# Altium PCB PCBA-2121-01.PcbDoc (part 1 of 2)
Units mil, origin at the board's own origin, x right, y up, seen from the top; angles counter-clockwise.
Board outline 748.03 x 2362.2 mil, 4 copper layers (L1, L2, L3, L4), stack 62.192 mil thick; 70 components, 51 nets, 274 pads, 177 vias.
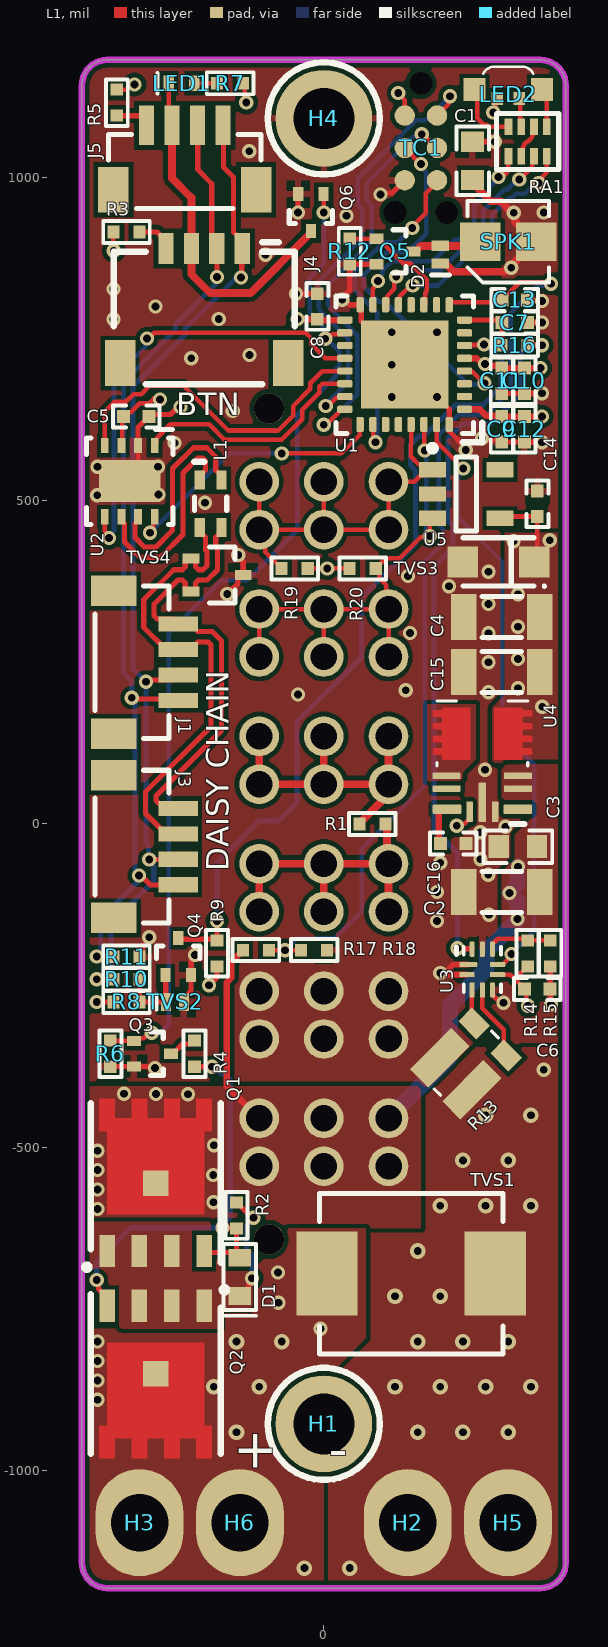
[diagram p0: L1 view]
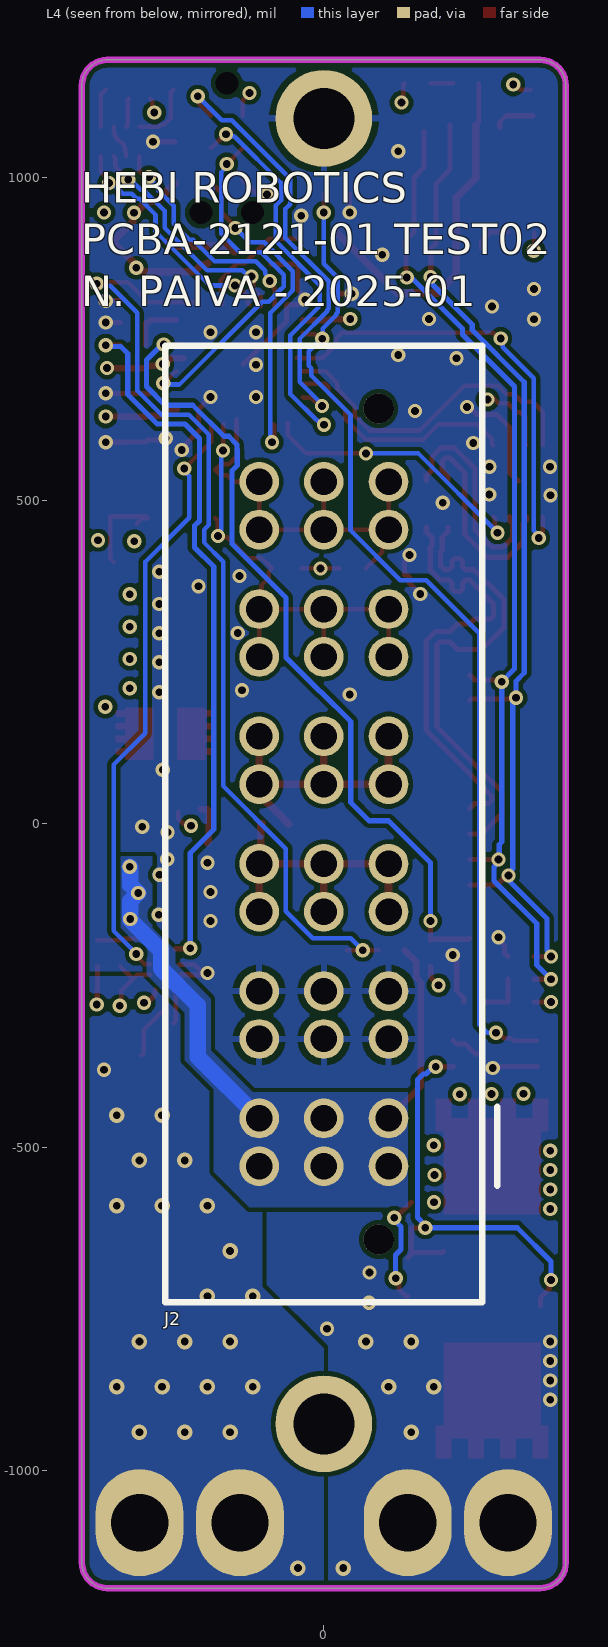
[diagram p1: L4 view, seen from below]
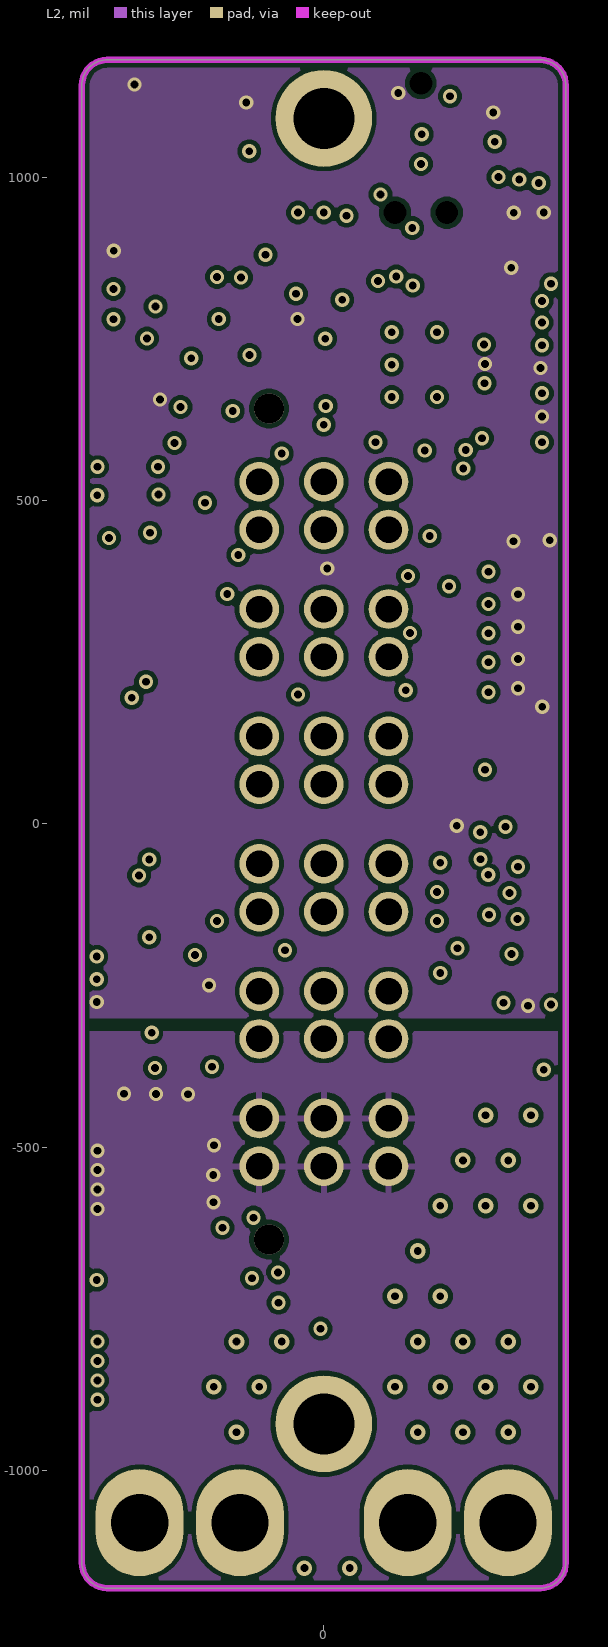
[diagram p2: L2]
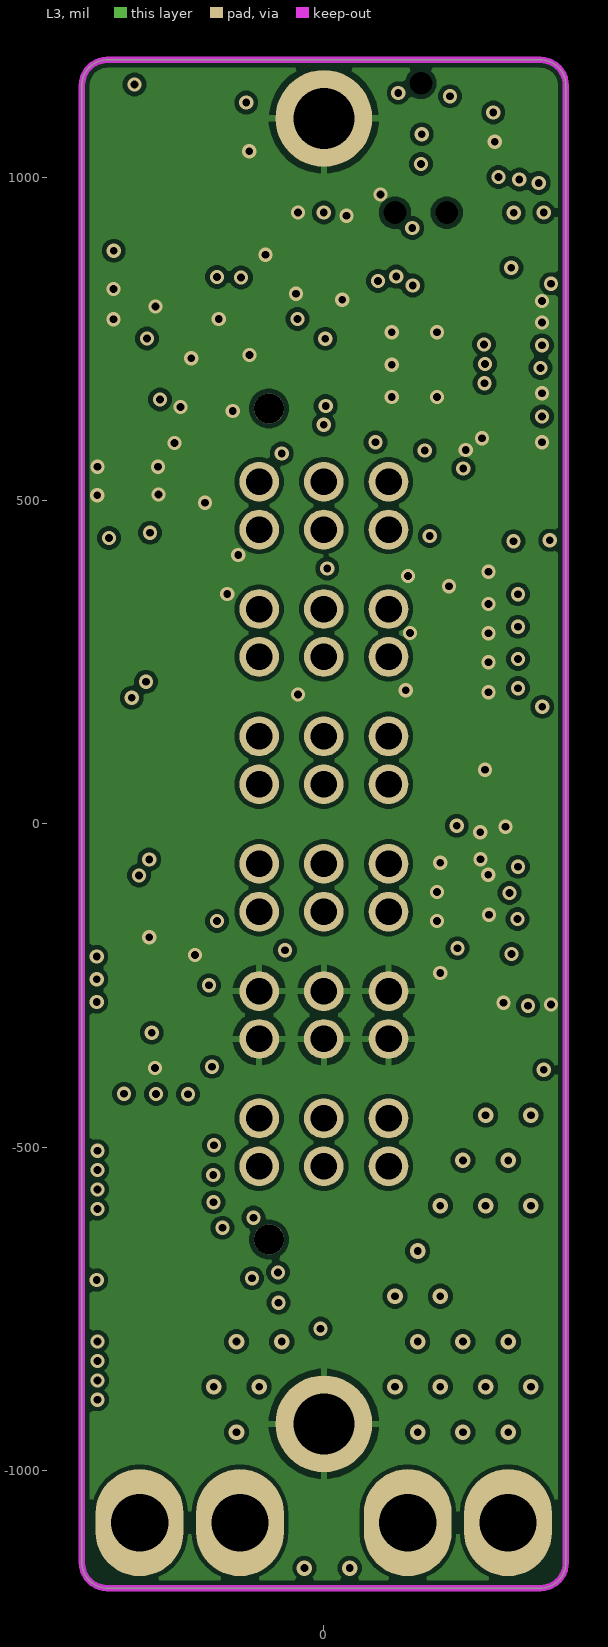
[diagram p3: L3]
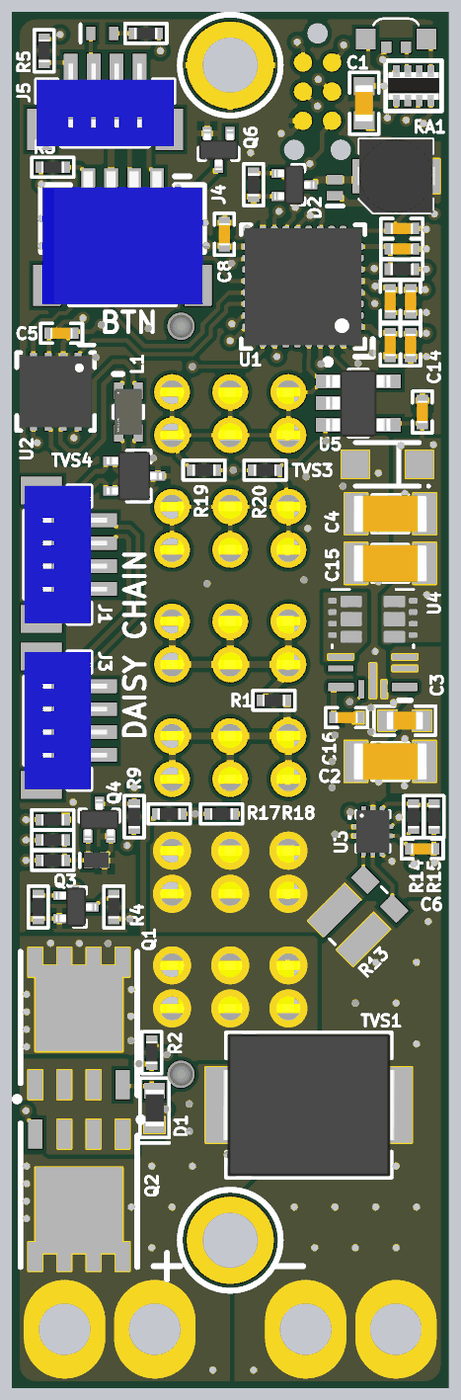
[diagram p4: 3D render of the assembled board from above, using the file's embedded part models]

## Layer stack, top to bottom
Top Solder: solder mask 0.4, Solder Resist, Dk 3.5
L1: signal copper 1.7
Dielectric 1: prepreg 2.8, PP-006, Dk 4.1
L2: signal copper 1.378
Dielectric 4: core 50.4362, Dk 4.2
L3: signal copper 1.378
Dielectric 2: prepreg 2.8, PP-006, Dk 4.1
L4: signal copper 1.7
Bottom Solder: solder mask 0.4, Solder Resist, Dk 3.5

## Board outline
-374.02,-1141.73 ccw(c-334.65,-1141.73) -334.65,-1181.1 334.65,-1181.1 ccw(c334.65,-1141.73) 374.02,-1141.73 374.02,1141.73 ccw(c334.65,1141.73) 334.65,1181.1 -334.65,1181.1 ccw(c-334.65,1141.73) -374.02,1141.73

## Design rules (kind name [scope] priority, off if disabled: settings)
Clearance [All] p1: gap=7 ignorepadtopadclearanceinfootprint=FALSE
ComponentClearance NO_BOM [IsNoBOMComponent] p1: gap=0 collisioncheckmode=3 verticalgap=0 showdistances=FALSE donotcheckwithout3dbody=TRUE
ComponentClearance ComponentClearance_2 [HasFootprint('ARJM11C7-114-BA-EW2-Footprint-1') vs HasFootprint('39-30-1020')] p2: gap=-10000 collisioncheckmode=3 verticalgap=100000 showdistances=FALSE
ComponentClearance ComponentClearance_1 [HasFootprint('ARJM11C7-114-BA-EW2-Footprint-1') vs HasFootprint('ARJM11C7-114-BA-EW2-Footprint-1')] p3: gap=-10000 collisioncheckmode=3 verticalgap=100000 showdistances=FALSE
ComponentClearance [All] p4: gap=10 collisioncheckmode=3 verticalgap=10 showdistances=FALSE
DiffPairsRouting [All] p1: maxlimit=10 minlimit=8 mostfreqgap=8 toplayer_minwidth=7 toplayer_maxwidth=15 toplayer_prefwidth=7 midlayer1_minwidth=7 midlayer1_maxwidth=15 midlayer1_prefwidth=7 midlayer2_minwidth=7 midlayer2_maxwidth=15 midlayer2_prefwidth=7 bottomlayer_minwidth=7 bottomlayer_maxwidth=15 bottomlayer_prefwidth=7 maxuncoupledlength=500
Height [All] p1: minheight=0 maxheight=2000 prefheight=500
HoleSize [All] p1: absolutevalues=TRUE maxlimit=1000 minlimit=1 maxpercent=80.000 minpercent=20.000
HoleToHoleClearance HoleToHoleClearance_1 [HasFootprint('PJ-037A') vs HasFootprint('PJ-037A')] p1: gap=0 allowstackedmicrovias=TRUE
HoleToHoleClearance [All] p2: gap=10 allowstackedmicrovias=TRUE
MinimumSolderMaskSliver [All] p1 off: minsoldermaskwidth=10
PolygonConnect PolygonConnect_1 [All vs IsNamedPolygon('NO_THERMAL')] p1: connectstyle=Direct reliefconductorwidth=10 reliefentries=4 polygonreliefangle="90 Angle" airgapwidth=10
PolygonConnect [All] p2: thpad.connectstyle=Relief thpad.reliefconductorwidth=10 thpad.reliefentries=4 thpad.polygonreliefangle="90 Angle" thpad.airgapwidth=10 smdpad.connectstyle=Relief smdpad.reliefconductorwidth=10 smdpad.reliefentries=4 smdpad.polygonreliefangle="90 Angle" smdpad.airgapwidth=10 via.connectstyle=Direct via.reliefconductorwidth=10 via.reliefentries=4 via.polygonreliefangle="90 Angle" via.airgapwidth=10
RoutingVias [All] p1: holewidth=12 width=22 viastyle="Through Hole" minholewidth=12 minwidth=22 maxholewidth=40 maxwidth=100
SilkToSilkClearance [All] p1 off: silktosilkclearance=10
SilkToSolderMaskClearance [IsPad] p1 off: minsilkscreentomaskgap=10 clearancetoexposedcopper=TRUE
SolderMaskExpansion "Via Tenting" [IsVia] p1: expansion=2 istentingtop=TRUE
SolderMaskExpansion SolderMaskExpansion_1 [All] p2: expansion=2 istentingtop=FALSE
SupplyNets "Schematic Supply Nets" [InNet('V-')] p1: voltage=0.000
SupplyNets "Schematic Supply Nets_5" [InNet('VBAT')] p2: voltage=0.000
SupplyNets "Schematic Supply Nets_4" [InNet('3V3')] p3: voltage=0.000
SupplyNets "Schematic Supply Nets_3" [InNet('GND')] p4: voltage=0.000
SupplyNets "Schematic Supply Nets_2" [InNet('V+')] p5: voltage=0.000
Width [All] p1: maxlimit=200 minlimit=7 preferedwidth=8
22 further rules are at their usual default settings.

## Classes and differential pairs
differential pair CAN_B: +CAN_B_P -CAN_B_N
differential pair I_SNS: +I_SNS_P -I_SNS_N
differential pair CAN: +CAN_P -CAN_N

## Components (designator, comment, footprint, x,y, rotation, side; value= is the part's Value field where it differs from the comment)
C1 "C-10uf-X5R-16V-10%-0603" C0603 230,1025 r90 top
C2 "C-2.2uf-X7R-100V-10%-1206" C1206 275,-105 r0 top
C3 "C-0.1uf-X7R-100V-20%-0603" C0603 300,-35 r0 top
C4 "C-22uf-X5R-25V-20%-1206" C1206 275,320 r0 top
C5 "C-0.1uf-X7R-25V-10%-0402" C0402 -290,630 r180 top
C6 "C-0.1uf-X7R-25V-10%-0402" C0402 330,-255 r180 top
C7 "C-10000pf-X7R-50V-10%-0402" C0402 295,775 r180 top
C8 "C-0.1uf-X7R-25V-10%-0402" C0402 -10,800 r270 top
C9 "C-0.1uf-X7R-25V-10%-0402" C0402 275,610 r90 top
C10 "C-0.1uf-X7R-25V-10%-0402" C0402 310,685 r90 top
C11 "C-10000pf-X7R-50V-10%-0402" C0402 275,685 r90 top
C12 "C-1uf-X5R-25V-10%-0402" C0402 310,610 r270 top
C13 "C-1uf-X5R-25V-10%-0402" C0402 295,810 r0 top
C14 "C-0.1uf-X7R-25V-10%-0402" C0402 330,495 r270 top
C15 "C-22uf-X5R-25V-20%-1206" C1206 275,235 r0 top
C16 "C-1uf-X5R-25V-10%-0402" C0402 200,-30 r180 top
D1 "CZRU52C10" CZRU52C10 -130,-700 r90 top
D2 "SBR05U20LP-7" DFN1006-2_DIODES 180,880 r90 top
H1 "M2-PLATED" M2-PLATED-NORMAL 0,-927.17 r0 top
H2 "PAD-AWG-12-WIDE" AWG-12-With-Wire 129.68,-1080 r180 top
H3 "PAD-AWG-12-WIDE" AWG-12-With-Wire -284.68,-1080 r180 top
H4 "M2-PLATED" M2-PLATED-NORMAL 0,1090.55 r0 top
H5 "PAD-AWG-12-WIDE" AWG-12-With-Wire 284.68,-1080 r180 top
H6 "PAD-AWG-12-WIDE" AWG-12-With-Wire -129.68,-1080 r180 top
J1 "BM04B-SRSS-TB(LF)(SN)" BM04B-SRSS-TB -275,250 r90 top
J2 "MPT-06-6.30-01-T-V" MPT-06-6.30-01-T-V-Footprint-1 0,0 r90 bottom locked
J3 "BM04B-SRSS-TB(LF)(SN)" BM04B-SRSS-TB -275,-35 r90 top
J4 "04FMN-SMT-A-TF(LF)(SN)" 04FMN-SMT-A-TF(LF)(SN)-Footprint-1 -185,795 r180 top
J5 "BM04B-SRSS-TB(LF)(SN)" BM04B-SRSS-TB -215,1030 r180 top
L1 "SRF2012-900YA" FP-SRF2012A-MFG -175,495 r270 top
LED1 "IN-S42ATG" IN-S42AT -220,1145 r180 top
LED2 "HSMF-C115" HSMF-C115 285,1135 r0 top
Q1 "FDMS86163P" FDMS86300DC -260,-555 r0 top
Q2 "FDMS86163P" FDMS86300DC -260,-850 r180 top
Q3 "DMN601TK-7" SOT50P160X80-3L -265,-355 r0 top
Q4 "DMN601TK-7" SOT50P160X80-3L -225,-205 r90 top
Q5 "DMN601TK-7" SOT50P160X80-3L 110,885 r0 top
Q6 "DMN601TK-7" SOT50P160X80-3L -20,945 r270 top
R1 "R-10k-1%-0.063w-0402" R0402 75,0 r0 top
R2 "R-100k-1%-0.063w-0402" R0402 -135,-605 r270 top
R3 "R-470-1%-0.063w-0402" R0402 -305,915 r0 top
R4 "R-200k-1%-0.063w-0402" R0402 -200,-355 r270 top
R5 "R-470-1%-0.063w-0402" R0402 -320,1115 r270 top
R6 "R-10k-1%-0.063w-0402" R0402 -330,-355 r90 top
R7 "R-470-1%-0.063w-0402" R0402 -145,1145 r180 top
R8 "R-1M-1%-0.063w-0402" R0402 -305,-275 r180 top
R9 "R-1M-1%-0.063w-0402" R0402 -165,-200 r270 top
R10 "R-100k-1%-0.063w-0402" R0402 -305,-240 r0 top
R11 "R-100k-1%-0.063w-0402" R0402 -305,-205 r0 top
R12 "R-100k-1%-0.063w-0402" R0402 40,885 r90 top
R13 "WSKW06122L000FEA" WSKW0612 220,-370 r315 top
R14 "R-200k-1%-0.063w-0402" R0402 315,-200 r90 top
R15 "R-100k-1%-0.063w-0402" R0402 350,-200 r270 top
R16 "R-10k-1%-0.063w-0402" R0402 295,740 r180 top
R17 "R-51k-1%-0.063w-0402" R0402 -105,-195 r0 top
R18 "R-2.55k-1%-0.063w-0402" R0402 -15,-195 r180 top
R19 "R-2.55k-1%-0.063w-0402" R0402 -45,395 r180 top
R20 "R-2.55k-1%-0.063w-0402" R0402 60,395 r0 top
RA1 "RA-4-C-100-5%-0.063w-0804" 741C083 315,1055 r270 top
SPK1 "SMT-0340-T-R" SMT-0340-T-R 285,900 r90 top
TC1 "CMP-694-0001-1" TC2030-MCP-NL_SMALL 150,1045 r270 top
TVS1 "5.0SMDJ51CA" DIOM6959X26L 135,-695 r180 top
TVS2 "D3V3H1U2LP-7B" DFN70P101X53-2N -230,-275 r0 top
TVS3 "PTVS3V3S1UR,115" SOD-123W_NXP 270,405 r180 top
TVS4 "ESD2CAN24DCKRQ1" SOT65P210X90-3L -165,385 r0 top
U1 "STM32L431KBU6" QFN50P500X500X60_HS-33L 125,710 r180 top
U2 "TCAN3414DRBR" SON65P300X100_HS-9L -300,530 r270 top
U3 "INA190A2IRSWR" QFN40P140X180X55-10L 245,-225 r0 top
U4 "TPSM365R6V3RDNR" TPSM365R6V3RDNR-Footprint-1 245,100 r180 top
U5 "24AA02E48T-I/OT" SOT95P280X100-5N 220,510 r0 top

## Footprints (in the part's own frame and the unit in brackets; to place one, negate y for a bottom-side part, rotate by r counter-clockwise, add the part's x,y. Pads: shape width x height; smd on the part's side, far side on the other; paste and mask are expansions set on the pad)
04FMN-SMT-A-TF(LF)(SN)-Footprint-1 [mm]
  rect 0.6x1.2 smd: 1(-1.5,-2.4) 2(-0.5,-2.4) 3(0.5,-2.4) 4(1.5,-2.4)
  rect 1.2x1.8 smd: PAD(-3.3,2.1) PAD(3.3,2.1)
  silkscreen extent -3.56,-2.65 3.56,2.93, body extent -3.5,-2.88 3.5,2.92, height 3.04
741C083 [mm] "CTS 741 0804 quad resistor pack 2.0x1.0mm .5mm height"
  rect 0.65x0.3 smd: 1(-0.575,0.75) 2(-0.575,0.25) 3(-0.575,-0.25) 4(-0.575,-0.75) 5(0.575,-0.75) 6(0.575,-0.25) 7(0.575,0.25) 8(0.575,0.75)
  silkscreen extent -1.1,-1.22 1.1,1.22, body extent -0.65,-1.1 0.65,1.1, height 0.5
AWG-12-With-Wire [mm] "IPC-2222-B"
  oval 3.45x4.2 hole 2.25: HOLE(0,0)
  body extent -1.7,-1.7 1.7,1.7, height 25.4
BM04B-SRSS-TB [mm] "JST SH 4 pin TOP entry"
  rect 1.2x1.8 smd: 0(-2.8,1.263) 0(2.8,1.263)
  rect 0.6x1.55 smd: 1(-1.5,-1.262) 2(-0.5,-1.262) 3(0.5,-1.262) 4(1.5,-1.262)
  silkscreen extent -3,-0.9 3,2, body extent -3,-1.6 3,2, height 4.3
C0402 [mm] "Generic 0402 Capacitor"
  rect 0.5x0.5 smd: 1(-0.5,0) 2(0.5,0)
  silkscreen extent -0.91,-0.43 0.91,0.43, body extent -0.5,-0.25 0.5,0.25, height 0.55
C0603 [mm] "Generic 0603 Capacitor"
  rect 0.8x0.9 smd: 1(-0.75,0) 2(0.75,0)
  silkscreen extent -1.35,-0.64 1.35,0.64, body extent -0.8,-0.4 0.8,0.4, height 0.9
C1206 [mm] "Generic 1206 Capacitor"
  rect 1x1.8 smd: 1(-1.5,0) 2(1.5,0)
  silkscreen extent -0.77,-0.8 0.77,0.8, body extent -1.6,-0.8 1.6,0.8, height 1.8
CZRU52C10 [mm]
  rect 0.7x0.9 smd: A(0.75,0) C(-0.75,0)
  silkscreen extent -1.52,-0.64 1.3,0.64, body extent -0.8,-0.4 0.8,0.4, height 0.55
DFN70P101X53-2N [mm] "DFN, 2-Leads, Body 0.61x1.01mm, Pitch 0.70mm, IPC Medium Density"
  rect 0.4x0.7 smd: A(0.35,0) C(-0.35,0)
  silkscreen extent -0.73,-0.3 -0.73,0.3, body extent -0.54,-0.34 0.54,0.34, height 0.53
DFN1006-2_DIODES [mm] "DFN1006-2 from DIODES INC"
  rect 0.4x0.7 smd: A(0.35,0) C(-0.35,0)
  silkscreen extent -0.8,-0.35 -0.8,0.35, body extent -0.54,-0.34 0.54,0.34, height 0.53
DIOM6959X26L [mm] "Molded Diode, 2-Leads, Body 6.86x5.91mm, IPC High Density"
  rect 2.4x3.3 smd: A(3.3,0) C(-3.3,0)
  silkscreen extent -3.6,-3.15 3.6,3.15, body extent -3.77,-3.11 3.77,3.11, height 2.62
FDMS86300DC [mm] "FDMS86300DC N-Channel Dual Cool PowerTrench MOSFET from Fairchild"
  rect 1x1 smd paste-1: D(0,0)
  rect 0.61x1.27 smd: G(1.905,-2.67) S(-1.905,-2.67) S(-0.635,-2.67) S(0.635,-2.67)
  L1 region: -2.21,3.305 -1.6,3.305 -1.6,2.535 -0.94,2.535 -0.94,3.305 -0.33,3.305 -0.33,2.535 0.33,2.535 0.33,3.305 0.94,3.305 0.94,2.535 1.6,2.535 1.6,3.305 2.21,3.305 2.21,2.035 1.905,2.035 1.905,-1.215 -1.905,-1.215 -1.905,2.035 -2.21,2.035
  silkscreen extent -2.8,-3.4 2.55,3.13, body extent -2.55,-3.13 2.55,3.13, height 1.05
FP-SRF2012A-MFG [mm]
  rect 0.75x0.4 smd: 1(-0.925,-0.425) 2(-0.925,0.425) 3(0.925,0.425) 4(0.925,-0.425)
  silkscreen extent -1.65,-0.64 0.25,0.64, body extent -1.4,-0.8 1.4,0.8, height 0.25
HSMF-C115 [mm] "HSMF-C115 LED CHIP RGB"
  rect 0.85x0.9 smd: 1(-1.325,0) 4(1.325,0)
  rect 0.45x0.5 smd: 2(-0.425,-0.35) 3(0.425,-0.35)
  silkscreen extent -0.99,0.62 0.99,0.9, body extent -1.25,-0.1 1.25,0.9, height 1
IN-S42AT [mm] "single 0402 LED 0.35mm height based on IN-S42AT"
  rect 0.4x0.6 smd: A(-0.5,0) C(0.5,0)
  silkscreen extent 0.95,-0.4 0.95,0.4, body extent -0.5,-0.25 0.5,0.25, height 0.35
M2-PLATED-NORMAL [mm]
  round 3.8 hole 2.4: HOLE(0,0)
  silkscreen extent -2.2,-2.2 2.2,2.2
MPT-06-6.30-01-T-V-Footprint-1 [mm] "Generic 0402 Capacitor"
  round 1.56 hole 1.04: 1(-13.44,-2.54) 1(-13.44,0) 1(-13.44,2.54) 1(-11.56,-2.54) 1(-11.56,0) 1(-11.56,2.54) 2(-8.44,-2.54) 2(-8.44,0) 2(-8.44,2.54) 2(-6.56,-2.54) 2(-6.56,0) 2(-6.56,2.54) 3(-3.44,-2.54) 3(-3.44,0) 3(-3.44,2.54) 3(-1.56,-2.54) 3(-1.56,0) 3(-1.56,2.54) 4(1.56,-2.54) 4(1.56,0) 4(1.56,2.54) 4(3.44,-2.54) 4(3.44,0) 4(3.44,2.54) 5(6.56,-2.54) 5(6.56,0) 5(6.56,2.54) 5(8.44,-2.54) 5(8.44,0) 5(8.44,2.54) 6(11.56,-2.54) 6(11.56,0) 6(11.56,2.54) 6(13.44,-2.54) 6(13.44,0) 6(13.44,2.54)
  round 1.19 hole 1.19 unplated: ""(-16.31,-2.15) ""(16.31,-2.15)
  silkscreen extent -18.77,-6.8 18.77,6.23, body extent -19.78,-6.22 19.78,6.23, height 11.5
QFN40P140X180X55-10L [mm] "QFN, 10-Leads, Body 1.40x1.80mm, Pitch 0.40mm, IPC High Density"
  rrect50% 0.7x0.2 smd: 1(-0.55,0.2)
  rrect50% 0.6x0.2 smd: 2(-0.6,-0.2) 6(0.6,-0.2) 7(0.6,0.2)
  rrect50% 0.2x0.6 smd: 3(-0.4,-0.8) 4(0,-0.8) 5(0.4,-0.8) 8(0.4,0.8) 9(0,0.8) 10(-0.4,0.8)
  silkscreen extent -1.02,-0.89 0.73,0.89, body extent -0.73,-0.93 0.73,0.93, height 0.55
QFN50P500X500X60_HS-33L [mm] "QFN, 32-Leads, Body 5.00x5.00mm, Pitch 0.50mm, Thermal Pad 3.50x3.50mm, IPC High Density"
  rrect50% 0.6x0.29 smd: 1(-2.35,1.75) 2(-2.35,1.25) 3(-2.35,0.75) 4(-2.35,0.25) 5(-2.35,-0.25) 6(-2.35,-0.75) 7(-2.35,-1.25) 8(-2.35,-1.75) 17(2.35,-1.75) 18(2.35,-1.25) 19(2.35,-0.75) 20(2.35,-0.25) 21(2.35,0.25) 22(2.35,0.75) 23(2.35,1.25) 24(2.35,1.75)
  rrect50% 0.29x0.6 smd: 9(-1.75,-2.35) 10(-1.25,-2.35) 11(-0.75,-2.35) 12(-0.25,-2.35) 13(0.25,-2.35) 14(0.75,-2.35) 15(1.25,-2.35) 16(1.75,-2.35) 25(1.75,2.35) 26(1.25,2.35) 27(0.75,2.35) 28(0.25,2.35) 29(-0.25,2.35) 30(-0.75,2.35) 31(-1.25,2.35) 32(-1.75,2.35)
  rect 3.45x3.45 smd: 33(0,0)
  silkscreen extent -3.05,-2.7 2.7,3.05, body extent -2.55,-2.55 2.55,2.55, height 0.6
R0402 [mm] "Generic 0402 Resistor"
  rect 0.475x0.5 smd: 1(-0.513,0) 2(0.513,0)
  silkscreen extent -0.91,-0.43 0.91,0.43, body extent -0.5,-0.25 0.5,0.25, height 0.4
SMT-0340-T-R [mm]
  rect 1.5x1.6 smd: 1(0,-1.1) 2(0,1.1)
  silkscreen extent -1.6,-1.6 1.6,1.6, body extent -1.6,-1.7 1.6,1.7, height 2
SOD-123W_NXP [mm] "1.7x2.6mm body flat bottomed diode package footprint based on http://www.nxp.com/documents/data_sheet/PTVSXS1UR_SER.pdf"
  rect 1.2x1.2 smd: A(1.4,0) C(-1.4,0)
  silkscreen extent -1.85,-0.95 1.4,1, body extent -1.4,-0.95 1.4,0.95, height 1.1
SON65P300X100_HS-9L [mm] "SON, 8-Leads, Body 3.00x3.00mm, Pitch 0.65mm, Thermal Pad 2.40x1.49mm, IPC High Density"
  rect 0.6x0.3 smd: 1(-1.4,0.975) 2(-1.4,0.325) 3(-1.4,-0.325) 4(-1.4,-0.975) 5(1.4,-0.975) 6(1.4,-0.325) 7(1.4,0.325) 8(1.4,0.975)
  rect 1.65x2.4 smd: 9(0,0)
  silkscreen extent -2.03,-1.7 1.7,1.7, body extent -1.55,-1.55 1.55,1.55, height 1
SOT50P160X80-3L [mm] "SOT23, 3-Leads, Body 1.60x1.60mm, Pitch 0.50mm, IPC High Density"
  rect 0.55x0.4 smd: D(0.725,0) G(-0.725,0.5) S(-0.725,-0.5)
  silkscreen extent -0.07,-0.85 0.43,0.85, body extent -0.87,-0.85 0.87,0.85, height 0.8
SOT65P210X90-3L [mm] "SOT23, 3-Leads, Body 2.00x2.10mm, Pitch 0.65mm, IPC High Density"
  rect 0.65x0.4 smd: 1(-1.025,0.65) 2(-1.025,-0.65) 3(1.025,0)
  silkscreen extent -0.3,-1.1 0.7,1.1, body extent -1.2,-1.07 1.2,1.07, height 0.9
SOT95P280X100-5N [mm] "SOT23, 5-Leads, Body 2.90x2.80mm, Pitch 0.95mm, IPC Medium Density"
  rect 1.05x0.6 smd: 1(-1.325,0.95) 2(-1.325,0) 3(-1.325,-0.95) 4(1.325,-0.95) 5(1.325,0.95)
  silkscreen extent -1.45,-1.45 0.4,1.92, body extent -1.4,-1.45 1.4,1.45, height 1
TC2030-MCP-NL_SMALL [mm]
  round 0.8 smd paste-0.4: 1(-1.27,-0.635) 2(-1.27,0.635) 3(0,-0.635) 4(0,0.635) 5(1.27,-0.635) 6(1.27,0.635)
  round 0.85 hole 0.9 unplated mask+0: ""(-2.54,0) ""(2.54,1.016) ""(2.54,-1.016)
TPSM365R6V3RDNR-Footprint-1 [mm]
  rrect25% 1.125x0.37 smd: 1(-1.388,1.96) 8(1.388,1.96)
  rrect25% 1.1x0.25 smd: 2(-1.4,1.15) 3(-1.4,0.65) 6(1.4,0.65) 7(1.4,1.15)
  round 0.025 smd paste-2539.97: 4(-1.213,-1) 5(1.213,-1)
  rrect25% 0.25x0.8 smd: 9(0.5,2.06) 11(-0.5,2.06)
  rrect25% 0.3x1.54 smd: 10(0,1.69)
  L1 region: 0.475,-1.975 0.479,-1.994 0.49,-2.01 0.506,-2.021 0.525,-2.025 0.525,-2.025 1.525,-2.025 1.544,-2.021 1.56,-2.01 1.571,-1.994 1.575,-1.975 1.575,-1.975 1.575,-1.975 1.579,-1.956 1.59,-1.94 1.606,-1.929 1.625,-1.925 1.625,-1.925 1.9,-1.925 1.919,-1.921 1.935,-1.91 1.946,-1.894 1.95,-1.875 1.95,-1.875 1.95,-1.725 1.946,-1.706 1.935,-1.69 1.919,-1.679 1.9,-1.675 1.9,-1.675 1.625,-1.675 1.606,-1.671 1.59,-1.66 1.579,-1.644 1.575,-1.625 1.575,-1.625 1.575,-1.475 1.579,-1.456 1.59,-1.44 1.606,-1.429 1.625,-1.425 1.625,-1.425 1.9,-1.425 1.919,-1.421 1.935,-1.41 1.946,-1.394 1.95,-1.375 1.95,-1.375 1.95,-1.225 1.946,-1.206 1.935,-1.19 1.919,-1.179 1.9,-1.175 1.9,-1.175 1.625,-1.175 1.606,-1.171 1.59,-1.16 1.579,-1.144 1.575,-1.125 1.575,-1.125 1.575,-0.975 1.579,-0.956 1.59,-0.94 1.606,-0.929 1.625,-0.925 1.625,-0.925 1.9,-0.925 1.919,-0.921 1.935,-0.91 1.946,-0.894 1.95,-0.875 1.95,-0.875 1.95,-0.725 1.946,-0.706 1.935,-0.69 1.919,-0.679 1.9,-0.675 1.9,-0.675 1.625,-0.675 1.606,-0.671 1.59,-0.66 1.579,-0.644 1.575,-0.625 1.575,-0.625 1.575,-0.475 1.579,-0.456 1.59,-0.44 1.606,-0.429 1.625,-0.425 1.625,-0.425 1.9,-0.425 1.919,-0.421 1.935,-0.41 1.946,-0.394 1.95,-0.375 1.95,-0.375 1.95,-0.225 1.946,-0.206 1.935,-0.19 1.919,-0.179 1.9,-0.175 1.9,-0.175 1.625,-0.175 1.606,-0.171 1.59,-0.16 1.579,-0.144 1.575,-0.125 1.575,-0.125 1.575,-0.025 1.571,-0.006 1.56,0.01 1.544,0.021 1.525,0.025 1.525,0.025 0.525,0.025 0.506,0.021 0.49,0.01 0.479,-0.006 0.475,-0.025 0.475,-0.025
  L1 region: -0.475,-1.975 -0.479,-1.994 -0.49,-2.01 -0.506,-2.021 -0.525,-2.025 -0.525,-2.025 -1.525,-2.025 -1.544,-2.021 -1.56,-2.01 -1.571,-1.994 -1.575,-1.975 -1.575,-1.975 -1.575,-1.975 -1.579,-1.956 -1.59,-1.94 -1.606,-1.929 -1.625,-1.925 -1.625,-1.925 -1.9,-1.925 -1.919,-1.921 -1.935,-1.91 -1.946,-1.894 -1.95,-1.875 -1.95,-1.875 -1.95,-1.725 -1.946,-1.706 -1.935,-1.69 -1.919,-1.679 -1.9,-1.675 -1.9,-1.675 -1.625,-1.675 -1.606,-1.671 -1.59,-1.66 -1.579,-1.644 -1.575,-1.625 -1.575,-1.625 -1.575,-1.475 -1.579,-1.456 -1.59,-1.44 -1.606,-1.429 -1.625,-1.425 -1.625,-1.425 -1.9,-1.425 -1.919,-1.421 -1.935,-1.41 -1.946,-1.394 -1.95,-1.375 -1.95,-1.375 -1.95,-1.225 -1.946,-1.206 -1.935,-1.19 -1.919,-1.179 -1.9,-1.175 -1.9,-1.175 -1.625,-1.175 -1.606,-1.171 -1.59,-1.16 -1.579,-1.144 -1.575,-1.125 -1.575,-1.125 -1.575,-0.975 -1.579,-0.956 -1.59,-0.94 -1.606,-0.929 -1.625,-0.925 -1.625,-0.925 -1.9,-0.925 -1.919,-0.921 -1.935,-0.91 -1.946,-0.894 -1.95,-0.875 -1.95,-0.875 -1.95,-0.725 -1.946,-0.706 -1.935,-0.69 -1.919,-0.679 -1.9,-0.675 -1.9,-0.675 -1.625,-0.675 -1.606,-0.671 -1.59,-0.66 -1.579,-0.644 -1.575,-0.625 -1.575,-0.625 -1.575,-0.475 -1.579,-0.456 -1.59,-0.44 -1.606,-0.429 -1.625,-0.425 -1.625,-0.425 -1.9,-0.425 -1.919,-0.421 -1.935,-0.41 -1.946,-0.394 -1.95,-0.375 -1.95,-0.375 -1.95,-0.225 -1.946,-0.206 -1.935,-0.19 -1.919,-0.179 -1.9,-0.175 -1.9,-0.175 -1.625,-0.175 -1.606,-0.171 -1.59,-0.16 -1.579,-0.144 -1.575,-0.125 -1.575,-0.125 -1.575,-0.025 -1.571,-0.006 -1.56,0.01 -1.544,0.021 -1.525,0.025 -1.525,0.025 -0.525,0.025 -0.506,0.021 -0.49,0.01 -0.479,-0.006 -0.475,-0.025 -0.475,-0.025
  silkscreen extent -1.78,-2.29 1.78,2.54, body extent -1.75,-2.25 1.75,2.25, height 2.1
WSKW0612 [mil]
  rect 40x90 smd: 1(-35,-22.5) 2(35,-22.5)
  rect 40x30 smd: 3(-35,52.5) 4(35,52.5)
  silkscreen extent -7,-63 7,63, body extent -31,-63 31,63, height 28

## Part data
C1: library part CMP-00102-2, "Capacitor Ceramic 10uF 16V X5R 10% SMD 0603", Capacitance=10uF, Operating Temperature="-55°C ~ 85°C", Package / Case=0603, Temperature Coefficient=X5R, Tolerance=10%, Voltage - Rated=16V
C2: library part CMP-01086-1, "Capacitor Ceramic 2.2uF 100V X7R 10% SMD 1206", Capacitance=2.2uF, Operating Temperature="-55°C ~ 125°C", Package / Case=1206, Temperature Coefficient=X7R, Tolerance=±10%, Voltage - Rated=100V
C3: library part C-0.1uf-X7R-100V-20%-0603-5, "Capacitor Ceramic 0.1uF 100V X7R 20% SMD 0603", Capacitance=0.1uF, Operating Temperature="-55°C ~ 125°C", Package / Case=0603, Temperature Coefficient=X7R, Tolerance=±20%, Voltage - Rated=100V
C4 C15: library part CMP-00094-2, "Capacitor Ceramic 22uF 25V X5R 20% SMD 1206", Capacitance=22uF, Operating Temperature="-55°C ~ 85°C", Package / Case=1206, Temperature Coefficient=X5R, Tolerance=20%, Voltage - Rated=25V
C5 C6 C8 C9 C10 C14: library part CMP-00040-11, "Capacitor Ceramic 0.1uF 25V X7R 10% SMD 0402", Capacitance=0.1uF, Operating Temperature="-55°C ~ 125°C", Package / Case=0402, Temperature Coefficient=X7R, Tolerance=10%, Voltage - Rated=25V
C7 C11: library part CMP-00041-8, "Capacitor Ceramic 10000pF 50V X7R 10% SMD 0402", Capacitance=10000pF, Operating Temperature="-55°C ~ 125°C", Package / Case=0402, Temperature Coefficient=X7R, Tolerance=10%, Voltage - Rated=50V
C12 C13 C16: library part C-1uf-X5R-25V-10%-0402-8, "Capacitor Ceramic 1uF 25V X5R 10% SMD 0402", Capacitance=1uF, Operating Temperature="-55°C ~ 85°C", Package / Case=0402, Temperature Coefficient=X5R, Tolerance=±10%, Voltage - Rated=25V
D1: library part CMP-00843-1, "DIODE ZENER 10V 150MW 0603", Max Operating Temperature=125°C, Max Power Dissipation=150mW, Min Operating Temperature=-55°C, Package Body Material=Plastic, Package Shape=Rectangular, Package Style="SMALL OUTLINEMeter", Peak Reflow Temperature (Cel)=260°C, Reference Voltage-Nom=10V, Test Current=5mA, Time @ Peak Reflow Temperature-Max (s)=30s, Voltage Tol-Max=5%, Diode Element Material=SILICON, Diode Type=ZENER, JESD-609 Code=e4, Number of Elements=1, Number of Terminals/Pins=2, Polarity=Unidirectional, REACH SVHC=Yes, RoHS Compliant=Yes, Surface Mount=Yes, Technology=ZENER, Terminal Finish=Gold, Terminal Form="No Lead", Terminal Position=DUAL
D2: library part CMP-698-0003-2, "DIODE SBR 20V 500MA 2DFN", Capacitance @ Vr, F=-, Current - Average Rectified (Io)=500mA, Current - Reverse Leakage @ Vr="50µA @ 20V", Operating Temperature - Junction="-65°C ~ 150°C", Package / Case=2-UFDFN, Supplier Device Package="2-DFN1006 (1.0x0.6)", Voltage - DC Reverse (Vr) (Max)=20V, Voltage - Forward (Vf) (Max) @ If="500mV @ 500mA", Category="Discrete Semiconductor Products", ComponentLink1Description=Datasheet, ComponentLink1URL=http://www.diodes.com/datasheets/SBR05U20LP.pdf, Diode Type="Super Barrier", Lead Free Status / RoHS Status="RoHS Compliant", Mounting Type="Surface Mount", Reverse Recovery Time (trr)=-, Speed="Fast Recovery =< 500ns, > 200mA (Io)"
H1 H4: library part CMP-00782-1, "M2 Size Screw Hole, Normal Fit, Plated", Size=M2
H2 H3 H5 H6: library part CMP-01047-1, "AWG 12 Hole with Wider Pad", Size=AWG12
J1 J3 J5: library part CMP-00286-2, "CONN HEADER SH 4POS TOP 1MM TIN", Color=Natural, Manufacturer="JST Sales America Inc", Category="Connectors, Interconnects", ComponentLink1Description=Datasheet, ComponentLink1URL=http://www.jst-mfg.com/product/pdf/eng/eSH.pdf, Connector Type="Header, Shrouded", Contact Finish=Tin, Contact Finish Thickness=-, Contact Mating Length=-, Contact Type="Male Pin", Fastening Type=-, Features="Solder Retention", Lead Free Status / RoHS Status="RoHS Compliant", Manufacturer Part Number=BM04B-SRSS-TB(LF)(SN), Mounting Type="Surface Mount", Number of Positions=4, Number of Positions Loaded=All, Number of Rows=1, Pitch="0.039\" (1.00mm)", Row Spacing=-, Termination=Solder
J2: library part CMP-00921-2, "5.00 MM POWERSTRIP/30 A DUAL BL", Color=Black, Max Operating Temperature=105°C, Min Operating Temperature=-55°C, Voltage Rating=812V, Contact Material="Copper Alloy", Contact Plating=Tin, Depth=12.45mm, Fastening Type=Ramp, Gender=Male, Housing Material=Polymer, Insulation Material=Polymer, Length=37.55mm, Mount="Through Hole", Number of Contacts=6, Number of Pins=36, Number of Ports=1, Number of Positions=6, Number of Rows=1, Number of Terminals/Pins=36, Orientation=Straight, Packaging=Tray, Radiation Hardening=No, RoHS Compliant=Yes, Series="PowerStrip™ 30 MPT", Termination=Solder
J4: library part CMP-1199-000014-1, "Ffc / Fpc Board Connector, Fmn Series, Surface Mount, Receptacle, 4, 1 Mm Rohs Compliant: Yes", Max Current Rating=500mA, Max Operating Temperature=85°C, Max Voltage Rating (DC)=50V, Min Operating Temperature=-25°C, Mounting Technology="Surface Mount", Number of Positions=4, Orientation="Right Angle", Pitch=1mm
L1: library part CMP-01087-1, "CMC 400MA 2LN 90 OHM SMD", Current Rating=400mA, DC Resistance-Max=300mR, Max Operating Temperature=125°C, Min Operating Temperature=-40°C, Voltage Rating=50V, Filter Type="DATA LINE FILTER", Height=1.2mm, Length=2mm, Mounting Technology="Surface Mount", Output Impedance=90R, Reach SVHC Compliant=Yes, RoHS Compliant=Yes, Width=1.2mm
LED1: library part CMP-00249-2, "LED GREEN CLEAR 0402 SMD", Case Code (Imperial)=0402, Case Code (Metric)=1005, Color=Green, Forward Voltage=3.3V, Lens Color=Clear, Test Current=20mA, Case/Package=0402, Dominant Wavelength=525nm, Height=0.55mm, Length=1mm, Lens Size=0.45mm, Lens Style=Flat, Lens Transparency=Clear, Luminous Intensity=450mcd, Mount="Surface Mount", Packaging="Cut Tape", Viewing Angle=130°, Width=0.5mm
LED2: library part CMP-00909-1, "LED RGB DIFFUSED CHIP SMD R/A", Case/Package=SMD/SMT, Color=Blue,Green,Red, Forward Current=20mA, Forward Voltage=3.4V, Lens Color=White, Max Operating Temperature=85°C, Min Operating Temperature=-40°C, Package Quantity=3000, Power Rating=78mW, Reverse Voltage=5V, Contact Plating=Gold, Depth=1mm, Dominant Wavelength=470nm, Height=1mm, Lead Free="Lead Free", Length=2.5mm, Lens Style=Diffused,Dome,Colorless,Rectangular, Lens Transparency=Diffused, Luminous Intensity=60mcd, Mount="Surface Mount", Number of Elements=3, Number of LEDs=3, Number of Pins=4, Packaging="Tape and Reel", Radiation Hardening=No, REACH SVHC="No SVHC", RoHS Compliant=Yes, Series=-, Test Current=20mA, Viewing Angle=125°, Wavelength=470nm, Width=1mm
Q1 Q2: library part CMP-00940-1, "MOSFET P-CH 100V 7.9A POWER56", Continuous Drain Current (ID)=-50A, Drain to Source Resistance=22mR, Drain to Source Voltage (Vdss)=-100V, Gate to Source Voltage (Vgs)=25V, Max Operating Temperature=150°C, Max Power Dissipation=104W, Min Operating Temperature=-55°C, Threshold Voltage=-2.8V, Element Configuration=Single, Height=1.05mm, Length=5mm, Rds On Max=22mR, Width=5.85mm
Q3 Q4 Q5 Q6: library part CMP-01042-1, "MOSFET N-CH 60V 300MA SOT-523", Drain Current-Max (ID)=300mA, DS Breakdown Voltage-Min=60V, Max Operating Temperature=150°C
R1 R6 R16: library part CMP-00015-10, "Resistor 0402 10k Ohm 1% 1-16 Watt", Package=0402, Power="0.063W, 1/16W", Resistance=10k, Tolerance=1%
R2 R10 R11 R12 R15: library part CMP-00014-5, "Resistor 0402 100k Ohm 1% 1-16 Watt", Package=0402, Power="0.063W, 1/16W", Resistance=100k, Tolerance=1%
R3 R5 R7: library part CMP-00097-1, "Resistor 0402 470 Ohm 1% 1-16 Watt", Package=0402, Power="0.063W, 1/16W", Resistance=470, Tolerance=1%
R4 R14: library part CMP-00010-6, "Resistor 0402 200k Ohm 1% 1-16 Watt", Package=0402, Power="0.063W, 1/16W", Resistance=200k, Tolerance=1%
R8 R9: library part CMP-00025-6, "Resistor 0402 1M Ohm 1% 1-16 Watt", Package=0402, Power="0.063W, 1/16W", Resistance=1M, Tolerance=1%
R13: library part CMP-01032-2, "RES 0.002 OHM 1W 0612 KELVIN", Resistance=0.002
R17: library part CMP-00112-4, "Resistor 0402 51k Ohm 1% 1-16 Watt", Package / Case=0402, Power="0.063W, 1/16W", Resistance=51k, Tolerance (%)=±1%, Part Name=R-51k-1%-0.063w-0402
R18: library part CMP-00113-3, "Resistor 0402 2.55k Ohm 1% 1-16 Watt", Package / Case=0402, Power="0.063W, 1/16W", Resistance=2.55k, Tolerance (%)=±1%, Part Name=R-2.55k-1%-0.063w-0402
R19 R20: library part CMP-00113-2, "Resistor 0402 2.55k Ohm 1% 1-16 Watt", Package / Case=0402, Power="0.063W, 1/16W", Resistance=2.55k, Tolerance (%)=±1%, Part Name=R-2.55k-1%-0.063w-0402
RA1: library part CMP-340-0000-6, "100 ohm Resistor Array 4 Element Concave 5%  1-16Watt 0804", Number of Resistors=4, Package / Case="0804, Concave, Long Side Terminals", Power=0.063W, Resistance=100, Tolerance (%)=±5%, Circuit Type=Isolated, Number of Pins=4, Part Name=RA-4-C-100-5%-0.063w-0804, Terminal Style="Long Side"
SPK1: library part CMP-00933-2, "BUZZER MAGNETIC 3V 3.2X3.2MM SMD", Current=120mA, Frequency=4kHz, Voltage=3V
TC1: "TC2030-MCP-NL", Manufacturer Part Number=TC2030-MCP-NL_SMALL
TVS1: library part CMP-00903-1, "TVS DIODE 51VWM 82.4VC DO214AB", Clamping Voltage=82.4V, Max Operating Temperature=150°C, Min Breakdown Voltage=56.7V, Min Operating Temperature=-55°C, Package Quantity=3000, Peak Pulse Current=60.7A, Peak Pulse Power=5kW, Power Line Protection=No, Resistor Type=Zener, Reverse Standoff Voltage=51V, Diode Type=ZENER, Lead Free="Lead Free", Mount="Surface Mount", Number of Bidirectional Channels=1, Packaging="Tape and Reel", RoHS Compliant=Yes, Series=5.0SMDJ
TVS2: library part CMP-00666-1, "TVS DIODE 3.3V 10V DFN1006-2", RoHS Compliant=Yes
TVS3: library part CMP-00447-5, "TVS DIODE 3.3VWM 8VC SOD123W", Capacitance @ Frequency=-, Current - Peak Pulse (10/1000µs)=43.8A, Operating Temperature="-55°C ~ 150°C (TA)", Package / Case=SOD-123W, Power - Peak Pulse=400W, Power Line Protection=No, Supplier Device Package=SOD123W, Voltage - Breakdown (Min)=5.2V, Voltage - Clamping (Max) @ Ipp=8V, Voltage - Reverse Standoff (Typ)=3.3V, Applications=Automotive, Bidirectional Channels=-, Category="Circuit Protection", ComponentLink1Description=Datasheet, ComponentLink1URL=http://www.nxp.com/documents/data_sheet/PTVSXS1UR_SER.pdf, Lead Free Status / RoHS Status="RoHS Compliant", Mounting Type="Surface Mount", Type=Zener, Unidirectional Channels=1
TVS4: library part CMP-01080-1, "TVS DIODE 24VWM 37VC CAN SC703"
U1: library part CMP-01077-1, "IC MCU 32BIT 128KB FLSH 32UFQFPN", Case/Package=UFQFPN, Max Operating Temperature=85°C, Min Operating Temperature=-40°C, Core Architecture=ARM, Interface="CANbus, I2C, IrDA, LINbus, QSPI, SAI, SPI, SWPMI, UART/USART", Memory Format=FLASH, Memory Size=64KB, Mounting Technology="Surface Mount", Number of I/Os=26, Oscillator Type=Internal, Peripherals="Brown-out Detect/Reset,PWM,WDT,DMA", RoHS Compliant=Yes, Series=STM32L4
U2: library part CMP-01078-2, "IC TRANSCEIVER HALF 1/1 8SON"
U3: library part CMP-01079-1, "IC CURR SENSE 1 CIRCUIT 10UQFN"
U4: library part CMP-01085-2, "3-V TO 65-V INPUT, 3V3 OUT, 300mA"
U5: library part CMP-680-0000-3, "IC EEPROM 2KBIT 400KHZ SOT23-5", Manufacturer="Microchip Technology", Operating Temperature="-40°C ~ 85°C", Package / Case="SC-74A, SOT-753", Supplier Device Package=SOT-23-5, Voltage - Supply="1.7 V ~ 5.5 V", Category="Integrated Circuits (ICs)", ComponentLink1Description=Datasheet, ComponentLink1URL=http://www.microchip.com/mymicrochip/filehandler.aspx?ddocname=en538826, Format - Memory="EEPROMs - Serial (with MAC Address)", Interface="I²C, 2-Wire Serial", Lead Free Status / RoHS Status="RoHS Compliant", Manufacturer Part Number=24AA02E48T-I/OT, Memory Size="2K (256 x 8)", Memory Type=EEPROM, Speed="100kHz, 400kHz"

## Via types
v1: diameter 22, hole 12, L1 to L4, tented both sides, 150 vias
v2: diameter 24, hole 12, L1 to L4, tented both sides, 27 vias

## Nets (pads, with @x,y where several pads share a name; then routed paths per layer and width w, separated by ;. In a path a pad name is that pad's centre, name@x,y a point inside that pad or via, vN(x,y) a via of type N, cw(c..) or ccw(c..) an arc to the next point about the centre after c; other vN are vias at no path point)
3V3: C1.1 C4.2 C5.2 C6.2 C8.2 C9.2 C10.2 C11.2 C12.1 C14.2 C15.2 D2.C LED2.2 R3.1 R5.1 R7.1 R8.2 R9.2 R14.1 R19.1 R20.1 SPK1.1 TC1.1 TVS3.C U1.1 U1.5 U1.17 U2.3 U3.6 U4.4 U4.9 U5.4 | length 1320.5
  L1 w7: R3.1 -325.18,886.72 v1(-324.58,886.13) ; R5.1 -319.92,1135.26 -303.63,1135.26 -295.83,1143.06 v1(-292.6,1143.06) ; U2.3 -311.24,586.67 -311.24,628.44 -303.34,636.34 -298.51,636.34 -284.51,650.34 -269.94,650.34 -262.55,657.73 -254.55,657.73 v1(-253.06,656.25) ; R7.1 -122.41,1142.59 -122.41,1117.41 v1(-120,1115) ; R19.1@-24.65,395 v1(5.18,395) R20.1@35,395 ; v1(115,1130) 115,1128.97 125,1118.97 TC1.1 ; v1(205.35,-2.73) 208.22,0.14 217.39,0.14 225.32,8.07 U4.9 ; v1(261.99,1099.85) 264.86,1102.72 264.86,1117.81 LED2.2 ; U3.6 288.19,-232.87 294,-238.69 ; U5.4@289.33,464.29 281.02,472.6 U5.4 274.88,475.31 C14.2 330,409.88 TVS3.C ; v1(293.07,437.05) v1@293.07,441.11 ; R14.1 314.51,-220.18 296,-238.69 294,-238.69 ; v1(315.5,-280.82) 312.91,-278.23 312.91,-257.59 294,-238.69
  L1 w8: v1(-351.02,-275) R8.2 ; v1(-177.34,-249.33) -165.35,-237.34 -165.35,-220.53 R9.2
  L1 w10: v1(-40.78,780.57) -40.65,780.44 -10.13,780.44 -8.49,778.8 U1.17@32.39,778.8 ; U1.5 236.3,719.84 245.08,711.07 v1(249.14,711.07) ; U1.1@227.52,641.1 240.69,641.1 250.68,631.11 C9.2@275,631.11 ; v1@247.17,713.04 v1(249.14,711.07) ; C9.2 275.33,629.32 309.63,629.32 C12.1 310.16,629.84 336.86,629.84 v1(337.02,630) ; C11.2 270.16,708.2 252.01,708.2 v1(249.14,711.07) ; C11.2@280.49,704.69 C10.2 310.32,704.69 310.47,704.84 334.84,704.84 v1(335,705) ; C10.2@310.56,704.69 320.32,704.69
  L1 w12: D2.C 181.87,864.35 189.73,864.35 200.51,853.57 279.91,853.57 SPK1.1@326.34,900 ; C1.1@230,990.32 257.82,962.5 273.24,962.5 290.89,944.84 v1(293.6,944.84) 295.51,942.92 295.51,930.82 SPK1.1@326.34,900 ; SPK1.1 SPK1.1@326.34,900
  other v1: 337.7,181.19 300,210 300,255 300,305 300,355 349.08,438.65 289.84,859.84 340,945
CAN_B_N: L1.1 U2.6 | length 330.1
  L1 w8: U2.6 -312.8,468.98 -308,464.18 -308,435.99 -284.33,412.32 -252.85,412.32 -217.72,447.46 -217.72,542.7 -194.85,565.57 -187.69,565.57 -183,560.88 -183,546.87 -187.69,542.18 -187.86,542.18 -191.73,538.31 L1.1
CAN_B_P: L1.2 U2.7 | length 330.1
  L1 w8: U2.7 -287.2,468.98 -292,464.18 -292,442.61 -277.71,428.32 -259.48,428.32 -233.72,454.08 -233.72,549.33 -201.48,581.57 -181.06,581.57 -167,567.51 -167,546.87 -162.31,542.18 -162.14,542.18 -158.27,538.31 L1.2
CAN_N: J1.3 J3.3 L1.4 TVS4.1 | length 737.1
  L1 w8: J3.3 -244,-15.31 -275.52,16.21 -275.52,49.81 -174.41,150.91 -174.41,276.68 -179.1,281.37 -194.91,281.37 -206.59,269.69 J1.3 -244,269.69 -278.27,303.96 -278.27,346.82 -232.09,393 -218.84,393 -214.15,397.69 -214.15,406.72 TVS4.1@-210.28,410.59 ; TVS4.1 -202.09,410.59 -198.22,406.72 -198.22,397.69 -193.53,393 -186.72,393 -180.56,399.16 -180.56,421.09 -183,423.53 -183,443.13 -187.69,447.82 -187.86,447.82 -191.73,451.69 L1.4
CAN_P: J1.4 J3.4 L1.3 TVS4.2 | length 681.7
  L1 w8: J3.4 -233.11,31.87 -254.84,31.87 -259.52,36.55 -259.52,43.18 -158.41,144.29 -158.41,283.31 -172.47,297.37 -194.91,297.37 -206.59,309.06 J1.4 -233.11,316.87 -257.59,316.87 -262.27,321.55 -262.27,340.19 -225.46,377 -218.84,377 -214.15,372.31 -214.15,363.28 -210.28,359.41 TVS4.2 -202.09,359.41 -198.22,363.28 -198.22,372.31 -193.53,377 -180.09,377 -164.56,392.53 -164.56,427.72 -167,430.16 -167,443.13 -162.31,447.82 -162.14,447.82 -158.27,451.69 L1.3
CAN_RX: U1.21 U2.4 | length 520.6
  L1 w7: U2.4 -338.39,637.38 -323.34,652.43 -306.06,652.43 -294.14,664.34 -282.29,664.34 -268.88,677.75 -217.53,677.75 -147.99,608.2 -70.59,608.2 -47.45,631.34 -47.45,646.04 -20.96,672.54 -20.96,681.43 -2.71,699.67 32,699.67 U1.21
CAN_TX: U1.22 U2.1 | length 371.6
  L1 w7: U2.1 -259.21,587.52 -259.21,595.63 -237.18,617.66 -177.24,617.66 -153.78,594.2 -64.79,594.2 -33.45,625.54 -33.45,640.25 -6.96,666.74 -6.96,675.63 -2.11,680.47 U1.22
EN_N: J2.3 R1.2 | length 485.5
  L1 w12: J2.3@-100,-135.43 -100,-61.42 J2.3@0,-61.42 ; J2.3@0,-135.43 J2.3@0,-61.42 ; R1.2 97.59,-2.41 97.59,-59.01 J2.3@100,-61.42 ; J2.3@100,-135.43 J2.3@100,-61.42 ; J2.3@0,-61.42 J2.3@100,-61.42
EN_P: J2.4 R1.1 | length 502.2
  L1 w12: J2.4@-100,135.43 -100,61.42 J2.4@0,61.42 ; J2.4@0,135.43 J2.4@0,61.42 ; R1.1 58.17,3.35 58.17,4.03 90.54,36.4 90.54,51.96 J2.4@100,61.42 ; J2.4@100,135.43 J2.4@100,61.42 ; J2.4@0,61.42 J2.4@100,61.42
GND: C1.2 C2.1 C3.1 C4.1 C5.1 C6.1 C7.1 C8.1 C9.1 C10.1 C11.1 C12.2 C13.2 C14.1 C15.1 C16.1 H1.HOLE H4.HOLE J2.2 Q3.S Q4.S Q5.S Q6.S R6.1 R11.2 R12.1 R13.1 R15.2 R18.1 TC1.5 TVS2.A TVS3.A TVS4.3 U1.16 U1.32 U1.33 U2.2 U2.9 U3.1 U3.2 U3.5 U3.9 U4.10 U4.11 U5.2 | length 1290.7
  L1 w8: R6.1 -329.75,-374.93 -293.79,-374.93 Q3.S -263.33,-374.69 v1(-260.96,-377.06) ; U2.9 -287.2,542.8 U2.2 -287.2,613.11 -267.38,632.93 -236.9,632.93 -225.24,644.59 v1(-221.45,644.59) ; R11.2 -279.47,-199.65 -279.47,-188.26 -270,-178.79 v1(-270,-175) ; TVS2.A -216.22,-269.09 -205.31,-258.19 -205.31,-212.46 -199.24,-206.38 v1(-199.24,-202.59) ; v1(-149.15,355.31) -132.89,371.57 -132.89,381.13 -129.01,385 TVS4.3 -124.65,404.78 -132.36,412.5 v1(-132.36,415.94) ; v1(-43.09,819.73) C8.1 ; v1(-40,945) -39.84,945.16 -39.84,973.39 Q6.S ; Q5.S 81.21,865.07 40.25,865.07 R12.1 40,825.39 28.56,813.94 v1(28.56,810.15) 32.08,810.15 39.71,802.52 U1.16 57.81,800.81 57.81,777.19 124.78,710.22 U1.33@124.78,710 ; v1(87.69,972.89) 90.18,975.38 105.38,975.38 TC1.5 ; v1(175,660) 193.9,641.1 U1.32 ; v1(179.93,-230.11) 186.86,-230.11 199.79,-217.19 223.28,-217.19 U3.1 ; v1@186.86,-232.87 U3.2 ; U1.32@193.06,607.7 219.45,581.31 v1(219.45,578.28) ; C1.2 v1(264.18,1054.51) ; v1(244.43,596.38) 247.11,593.7 272.01,593.7 275.4,590.31 C12.2 310.16,590.16 336.86,590.16 v1(337.02,590) ; U3.5 260.75,-264.24 270.21,-273.71 275.21,-273.71 v1(277.89,-276.39) ; C11.1@270.68,664.95 C11.1@270.77,664.86 ; C11.1@275.77,664.86 276.23,665.32 C10.1@310.16,665.32 ; C10.1 310.16,665.48 336.85,665.48 v1(337.02,665.64) ; C7.1 v1(337.02,775) ; C13.2 315.47,809.22 336.23,809.22 v1(337.02,808.44) ; R15.2 349.84,-220.33 349.84,-254.84 C6.1 350.34,-255.66 350.34,-278.53 v1(351,-279.19)
  other v1: 175,-150 255.12,-140.43 175,-105 254.05,-78.59 180,-60 242.1,-54.33 241.84,-12.91 280.6,-4.42 249,83.72 -40,200 254.58,203.5 126.58,206.59 254.58,250 133.12,295.25 254.58,295 254.58,340 193.59,367.57 130.26,383.51 254.58,390 -183.64,496.54 -350.22,508.29 -255.72,509.37 -349.69,552.07 -256.23,552.07 -230.81,588.78 -140.91,638.47 105,660 105,710 -205,720 -115,725 105,760 175,760 -325,780 -162.54,780.57 -260,800 -325,826.99 -90.16,879.84 35,940 -115.16,1039.84
I_SNS_N: R13.4 U3.4 | length 111.4
  L1 w7: U3.4@245,-261.5 245,-284.69 278.34,-318.03 278.34,-354.09 R13.4
I_SNS_P: R13.3 U3.3 | length 48.3
  L1 w7: U3.3@229.25,-261.5 228.84,-261.91 228.84,-304.59 R13.3
IBAT_SNS: C7.2 R16.2 U1.8 | length 80.7
  L1 w8: U1.8@227.52,778.9 269.47,778.9 270.31,778.06 C7.2@270.31,775 ; R16.2@275.31,740.49 C7.2
LED_B: RA1.5 U1.15 | length 362
  L1 w7: U1.15@76.83,801.52 75.79,802.56 75.79,827.44 83.73,835.38 v1(83.73,839.44) ; v1(270.11,999.96) 272.98,1002.83 278.62,1002.83 285.24,1009.45 285.24,1032.13 RA1.5
  L4 w7: v1(83.73,839.44) 83.73,843.5 90.46,850.22 90.46,855.01 105.45,870 168.99,870 201.77,902.78 207.49,902.78 232.22,927.51 232.22,955.75 255.59,979.12 255.59,984.07 270.11,998.59 v1(270.11,999.96)
LED_G: RA1.8 U1.13 | length 363.4
  L1 w7: U1.13 117.37,804.73 117.37,815.74 133.96,832.33 v1(137.48,832.33) ; v1(332.14,990.65) 332.14,994.71 344.53,1007.1 RA1.8
  L4 w7: v1(137.48,832.33) 176.63,832.33 260.22,915.92 260.22,941.86 284.7,966.34 289.06,966.34 296.99,974.27 310.87,974.27 321.5,984.89 322.32,984.89 328.08,990.65 v1(332.14,990.65)
LED_R: RA1.7 U1.14 | length 364.8
  L1 w7: U1.14@97.68,800.56 97.68,815.85 109.09,827.26 109.09,843.23 v1(111.96,846.1) ; v1(302.19,996) 302.34,996 322.44,1016.09 322.44,1029.96 RA1.7
  L4 w7: v1(111.96,846.1) 116.01,846.1 125.91,856 180.5,856 246.22,921.71 246.22,947.66 278.9,980.34 283.26,980.34 298.92,996 v1(302.19,996)
LED_SW: J4.3 J5.3 LED1.C Q6.D | length 548
  L1 w7: LED1.C -239.68,1084.7 J5.3
  L1 w12: J5.3 -234.69,998.25 -204.68,968.25 J4.3 -204.68,849.68 -175.58,820.58 -113.45,820.58 -22.41,911.63 -21.87,911.63 -20,913.5 Q6.D
NetC16_2: C16.2 U4.8 | length 65.2
  L1 w10: C16.2 177.76,-27.44 177.76,20.55 180.04,22.83 U4.8
NetD1_A: D1.A Q1.G Q2.G R2.2 R4.2 | length 706.2
  L1 w8: v1(-351.02,-705) -348.34,-707.68 -348.34,-718.55 -335,-731.89 Q2.G ; R4.2 v1@-172.86,-375.16 ; Q1.G -182.65,-662.46 -135,-662.46 R2.2 -135.61,-624.57 -156.23,-624.57 v1(-156.84,-623.95) ; D1.A@-135,-665.47 D1.A
  L4 w8: v1(-351.02,-705) -351.02,-676.02 -298.95,-623.95 v1(-156.84,-623.95) -156.84,-620.17 -144.78,-608.1 -144.78,-395.22 -153.79,-386.21 -157.97,-386.21 -169.05,-375.13 v1(-172.84,-375.13)
NetD1_C: D1.C Q1.S Q2.S R2.1 | length 175.3
  L1 w8: R2.1 -134.51,-584.82 -110.9,-608.43 v1(-108.75,-608.43) ; D1.C -126.06,-729.53 -116.28,-719.75 -116.28,-711.13 -111.16,-706.01 v1(-111.16,-702.22)
  L4 w8: v1(-111.16,-702.22) -110.53,-701.59 -110.53,-666.32 -119.07,-657.79 -119.07,-622.55 -108.75,-612.22 v1(-108.75,-608.43)
NetD2_A: D2.A Q5.D SPK1.2 | length 109.4
  L1 w12: Q5.D 140.42,886.87 143.37,886.87 150.02,893.52 235.21,893.52 SPK1.2
NetJ4_4: J4.4 R3.2 | length 58.3
  L1 w8: R3.2 -257.76,915 -244.05,901.3 J4.4
NetJ5_4: J5.4 R5.2 | length 63.3
  L1 w8: R5.2@-323.19,1094.82 -281.87,1094.82 -271.87,1084.82 J5.4@-271.87,1076.98
NetLED1_A: LED1.A R7.2 | length 35.1
  L1 w7: LED1.A R7.2
NetLED2_1: LED2.1 RA1.4 | length 99.7
  L1 w7: LED2.1 236.91,1130.93 236.91,1091.02 247.16,1080.78 252.07,1080.78 255.16,1077.68 RA1.4@285.43,1077.68
NetLED2_3: LED2.3 RA1.3 | length 45
  L1 w7: LED2.3 303.44,1119.51 303.44,1079.35 RA1.3
NetLED2_4: LED2.4 RA1.1 | length 60.4
  L1 w7: LED2.4 344.53,1127.64 RA1.1
NetQ3_D: Q3.D R4.1 | length 44.8
  L1 w8: Q3.D -233.5,-355 -218.68,-340.17 -205.35,-340.17 R4.1
NetQ4_G: Q4.G R8.1 R10.2 TVS2.C | length 117.9
  L1 w8: R10.2 R8.1 TVS2.C -244.23,-274.55 -244.23,-234 Q4.G
NetR14_2: R14.2 R15.1 U3.8 | length 101.4
  L1 w7: U3.8 261.19,-193.07 261.19,-185.19 268.8,-177.58 312.75,-177.58 R14.2 R15.1
NetR16_1: R16.1 U3.10 | length 1105.8
  L1 w8: v1(206.41,-192.06) 207.13,-192.78 229.19,-192.78 229.25,-192.84 U3.10 ; R16.1 v1(337.02,740)
  L4 w8: v1(206.41,-192.06) 206.41,-44.6 170.12,-8.31 170.12,397.91 199.71,427.5 199.71,460.87 192.03,468.54 192.03,595.74 214.68,618.38 257.55,618.38 303.16,663.99 303.16,727.31 314.02,738.17 335.19,738.17 v1(337.02,740)
NetRA1_2: RA1.2 RA1.6 | length 51.8
  L1 w7: RA1.6 306.73,1041.66 307.56,1044.19 308.97,1048.45 cw(c318.94,1045.16) 315.19,1054.97 ccw(c312.67,1061.49) 317.59,1056.52 318.49,1057.42 ; 318.51,1057.44 ccw(c311.06,1064.84) 319.68,1058.84 320.4,1059.88 ccw(c300.09,1074.02) 322.44,1063.38 ccw(c300.09,1074.02) 324.18,1068.34 324.84,1074.02 RA1.2
NetU4_5: U4.5 U4.6
NRST: TC1.3 U1.4 | length 565.2
  L1 w7: TC1.3 v1(150,1020) ; U1.4@227.52,700.16 228.53,700.16 247.55,681.14 v1(248.18,681.14)
  L4 w7: v1(150,1020) 150,1015.94 158.26,1007.69 158.26,912.43 129.82,884 97.15,884 61.99,848.84 61.99,830.8 67.93,824.86 85.31,807.46 95.03,807.46 223.18,679.31 246.35,679.31 v1(248.18,681.14)
OUTPUT_EN: Q3.G Q6.G R6.2 U1.18 | length 1579.6
  L1 w7: R6.2 -329.75,-335.07 -293.79,-335.07 Q3.G -289.17,-330.94 -278.33,-330.94 -270.07,-322.67 v1(-266.01,-322.67) ; Q6.G -0.16,973.39 -0.16,945.16 v1(0,945) ; v1(2.32,750.17) 6.38,750.17 13.22,757 30.27,757 U1.18
  L4 w7: v1(-266.01,-322.67) -252.67,-322.67 -240,-310 -240,295 -158.19,376.81 -118.19,376.81 -41.21,453.79 -41.21,632.49 19.11,692.81 19.11,704.14 23.58,708.61 23.58,730.76 4.17,750.17 v1(2.32,750.17) 1.61,750.88 1.61,765.87 -19.28,786.76 -19.28,788.66 -21.59,790.97 -21.59,844.46 0,866.05 v1(0,945)
PB_BUF: Q4.D R9.1 U1.6 | length 1261.7
  L1 w8: Q4.D -223.32,-178.14 -166.68,-178.14 R9.1 v1(-165,-150) ; U1.6 218.43,740.43 246.56,740.43 v1(247.47,741.34)
  L4 w8: v1(-165,-150) -165,-60 -100,5 -70,5 -41.71,33.29 -41.71,158.29 5,205 5.72,205 58.29,257.57 58.29,349.56 141.71,432.98 141.71,546.41 133.85,554.27 133.85,578.57 134.03,578.75 134.03,586.33 146.92,599.21 154.49,599.21 202.66,647.38 245.53,647.38 274.16,676.01 274.16,717.16 249.97,741.34 v1(247.47,741.34)
PB_EXT: J1.2 J3.2 J4.1 J5.1 R10.1 | length 1570.9
  L1 w8: v1(-351.02,-240) R10.1 ; v1(-275,220) -272.32,222.68 -232.93,222.68 J1.2 ; v1(-269.99,-54.98) -269.84,-54.83 -225.44,-54.83 J3.2 ; J5.1@-155,1070.52 -155,1015 -139.39,999.39 -139.39,914.69 -134.7,910 -134.65,910 -125.95,901.3 J4.1 -127,888.43 -127,845.64 v1(-128.06,844.58)
  L4 w8: v1(-351.02,-240) -329.02,-218 -329.02,-154.02 -263,-88 -263,-66.66 -263.63,-66.03 -263.63,-65.12 -269.99,-58.77 v1(-269.99,-54.98) -271,-53.98 -271,-31.98 -275,-27.98 v1(-275,220) -294.86,239.86 -294.86,676.19 -214.21,756.84 -214.21,765.38 -137.68,841.91 -130.73,841.91 v1(-128.06,844.58)
PB_EXT_RTN: J1.1 J3.1 J4.2 J5.2 R11.1 | length 1559.8
  L1 w8: v1(-351.02,-205) R11.1 ; v1(-297,195) -294.97,192.97 -227.32,192.97 J1.1 ; v1(-285.56,-79.44) -282.42,-79.44 -267.81,-94.06 J3.1 ; J5.2@-195,1080.49 -195,1011.6 -173.13,989.72 -173.13,897.3 -165.19,889.36 -165.19,845.76 v1(-165.06,845.63)
  L4 w8: v1(-351.02,-205) -351.02,-201.21 -345.01,-195.2 -345.01,-146.5 -288.24,-89.72 -288.24,-82.12 v1(-285.56,-79.44) -285.56,-75.66 -292,-69.21 -292,188.21 -295,191.21 v1@-295,195 ; v1(-297,195) -297,220.79 -309.86,233.65 -309.86,682.88 -229.39,763.36 -229.39,772.03 -167.74,833.68 -167.74,842.95 v1(-165.06,845.63)
SCL: J2.6 R19.2 U1.29 U5.1 | length 671.9
  L1 w7: J2.6@-100,529.13 J2.6@-100,455.12 ; R19.2 -65.18,395.49 -71.03,401.34 -71.52,401.34 -90.51,420.33 -90.51,445.63 J2.6@-100,455.12 ; J2.6@0,529.13 J2.6@0,455.12 ; U1.29@135,625.53 135,586.77 134.35,586.12 134.35,568.31 146.94,555.71 159.52,555.71 U5.1 159.52,539.09 149.6,539.09 139.64,529.13 100,529.13 100,455.12 J2.6@0,455.12 ; J2.6@-100,455.12 J2.6@0,455.12
SDA: J2.5 R20.2 U1.30 U5.3 | length 803.4
  L1 w7: J2.5@-100,258.27 -100,332.28 J2.5@0,332.28 ; J2.5@0,258.27 J2.5@0,332.28 ; J2.5@100,258.27 J2.5@100,332.28 ; U1.30@155,617.98 155.28,617.7 155.28,577.97 v1(156.03,577.21) ; U5.3 163.71,468.47 v1(163.71,445) 161.72,443.01 149.3,443.01 116.77,410.48 95.66,410.48 86.52,401.34 86.03,401.34 80.18,395.49 R20.2 85.48,389.69 85.48,380.27 96.36,369.39 96.36,335.92 J2.5@100,332.28 ; J2.5@0,332.28 J2.5@100,332.28
  L4 w7: v1(156.03,577.21) 158.25,575 158.25,454.52 163.71,449.06 v1(163.71,445)
SHDN: U1.20 U2.5 | length 708.7
  L1 w7: U2.5 -338.39,452.42 -332,446.04 v1(-332,441.98) ; v1(-273.51,750.51) -270.46,750.51 -261.91,759.07 -27.92,759.07 -19.18,750.32 -19.18,741.27 2.25,719.84 U1.20 ; U1.20@32.48,720.51 U1.20@41.81,720.51
  L4 w7: v1(-332,441.98) -332,445.94 -324.36,453.58 -324.36,688.89 -276.33,736.93 -276.33,747.7 v1(-273.51,750.51)
SNS_EN: U1.31 U3.7 | length 930.4
  L1 w7: U1.31@175,616.06 174.21,615.27 174.21,590.97 v1(215.65,549.53) ; U3.7 276.5,-217.13 289.95,-203.67 v1(289.95,-200.85)
  L4 w7: v1(215.65,549.53) 215.65,545.73 207.86,537.93 207.86,473.23 276.08,405 276.08,140.45 325,91.54 325,-165.04 289.95,-200.09 v1(289.95,-200.85)
SPKR: Q5.G R12.2 U1.11 | length 184.2
  L1 w7: R12.2 40.25,904.93 81.21,904.93 Q5.G 84.41,904.68 122.47,866.63 133.68,866.63 158.98,841.33 158.98,823.43 156.74,821.18 U1.11@156.74,803.47
STB: U1.25 U2.8 | length 433.6
  L1 w7: v1(-268.59,450.32) -268.59,454.38 -264.02,458.95 -264.02,472.48 U2.8 ; v1(-65,572.7) 27.2,572.7 55.69,601.19 55.69,620.02 U1.25@56.1,620.43
  L4 w7: v1(-268.59,450.32) -146.21,572.7 v1(-65,572.7)
SWCLK: TC1.4 U1.24 | length 633.9
  L1 w7: v1(-0.13,617.22) 3.92,617.22 11.28,624.57 11.68,624.57 24.17,637.06 24.17,638.89 U1.24@26.38,641.1 ; v1(151.35,1066.08) 152.64,1066.08 173.72,1045 TC1.4
  L4 w7: v1(-0.13,617.22) 3.92,617.22 11.28,624.57 11.68,624.57 51.58,664.46 51.58,755.5 8.72,798.35 8.72,800.26 6.41,802.57 6.41,832.86 74.06,900.51 74.06,956.11 66.19,963.98 66.19,990.86 138.54,1063.21 148.48,1063.21 v1(151.35,1066.08)
SWDIO: TC1.2 U1.23 | length 684.5
  L1 w7: v1(2.78,646.07) 6.75,646.07 19.26,658.58 31.18,658.58 U1.23@32.48,659.88 ; TC1.2 192.2,1112.2 192.2,1122.2 v1(195,1125)
  L4 w7: v1(2.78,646.07) 2.78,648.66 37.58,683.46 37.58,749.7 -5.28,792.55 -5.28,794.46 -7.59,796.77 -7.59,838.66 59.38,905.62 59.38,951 52.19,958.19 52.19,997.32 142.45,1087.58 157.58,1087.58 v1(195,1125)
SWO: TC1.6 U1.26 | length 515.3
  L1 w7: U1.26@78,617.48 76.6,616.09 76.6,597.45 80,594.06 v1(80,590) ; v1(136.76,921.34) 136.76,923.45 157.87,944.56 157.87,975.01 175,992.14 TC1.6
  L4 w7: v1(80,590) 82.5,592.5 82.5,790.47 53.93,819.03 47.99,825 47.99,854.64 92.35,899 114.42,899 v1(136.76,921.34)
V+: H3.HOLE H6.HOLE Q2.D TVS1.A
  other v1: -350,-890 -350,-860 -350,-830 -350,-800 -5,-780 -70,-740 -70.7,-693.07
  other v2: -30,-1150 -135,-940 -170,-870 -100,-870 -135,-800 -65,-800
V-: H2.HOLE H5.HOLE R13.2 TVS1.C
  other v1: 340,-380
  other v2: 40,-1150 145,-940 215,-940 285,-940 110,-870 180,-870 250,-870 320,-870 145,-800 215,-800 285,-800 110,-730 180,-730 145,-660 180,-590 250,-590 320,-590 215,-520 285,-520 250,-450 320,-450
VBAT: C2.2 C3.2 J2.1 Q1.D R17.1 U4.2 U4.3 | length 771.8
  L1 w10: R17.1 -125.18,-195.49 -143.16,-213.47 -143.16,-237.78 -149.84,-244.46 -149.84,-405.28 J2.1@-100,-455.12
  L4 w25: J2.1@100,-455.12 195,-360.12 195,-280 251.66,-223.34 251.66,-196 v1@299.26,-148.4 ; v1(299.26,-147.02) 299.26,-119.03 v1(286.78,-106.55) 299.26,-94.07 299.26,-66.89 v1(300.07,-66.08)
  other v1: -350,-595 -170.42,-584.5 -350,-565 -170.88,-542.54 -350,-535 -350,-505 -169.97,-496.69 -210.01,-417.66 -308.73,-416.93 -259.25,-417.42
VBAT_SNS: C13.1 R17.2 R18.2 U1.9 | length 1491.2
  L1 w7: R17.2 v1(-60,-195) R18.2 ; U1.9@193.9,806.89 194.53,806.26 269.68,806.26 C13.1@270.32,806.89 ; C13.1 302.75,837.44 348.58,837.44 v1(351.02,835)
  L4 w7: v1(-60,-195) -41.64,-176.64 17.07,-176.64 58.79,-134.92 58.79,-38.07 155.62,58.76 155.62,405.62 185.21,435.21 185.21,454.86 177.53,462.54 177.53,601.75 208.67,632.88 251.54,632.88 288.66,670 288.66,790.48 330.3,832.13 348.15,832.13 v1(351.02,835)
pads on no net: J1.0 J2. J3.0 J4.PAD J5.0 TC1. U1.2 U1.3 U1.7 U1.10 U1.12 U1.19 U1.27 U1.28 U4.1 U4.7 U5.5

## Polygon pours and split planes (outlines as drawn)
GND on L1 "NO_THERMAL" (solid, pour order 35): -365,596.95 -235.04,596.95 -235.04,456.97 -365,456.97
GND on L1 "NO_THERMAL" (solid, pour order 34): 300,-115 300,-10 325,15 325,60 280,105 265,105 265,455 175,455 155,435 155,-165 250,-165
NetU4_5 on L1 "NO_THERMAL" (solid, pour order 0): 215,65 215,80 235,100 235,185 160,185 160,65
VBAT on L1 "NO_THERMAL" (solid, pour order 16): 295,-16.3 321.24,9.94 321.24,29.35 275.65,29.35 275,30 275,85 282.18,92.18 375,92.18 375,-160 275,-160 275,-73.5 295,-53.5
GND on L1 "GND_L01_P033" (solid, pour order 33): -380,1185 380,1185 380,-1185 -376.1,-1185
3V3 on L1 "NO_THERMAL" (solid, pour order 31): 280,199.57 279.57,199.57 260,180 260,95 375,95 374.02,195 374.02,450 280,450